# Altium PCB PCB3.PcbDoc (part 1 of 2)
Units mm, origin at the board's own origin, x right, y up, seen from the top; angles counter-clockwise.
Board outline 152.4 x 101.6 mm, 4 copper layers (Top Layer, Int1 (GND), Layer 1, Bottom Layer), stack 1.237 mm thick; 184 components, 352 nets, 1100 pads, 26 vias.
Unrouted connection lines stored in the file: 656.
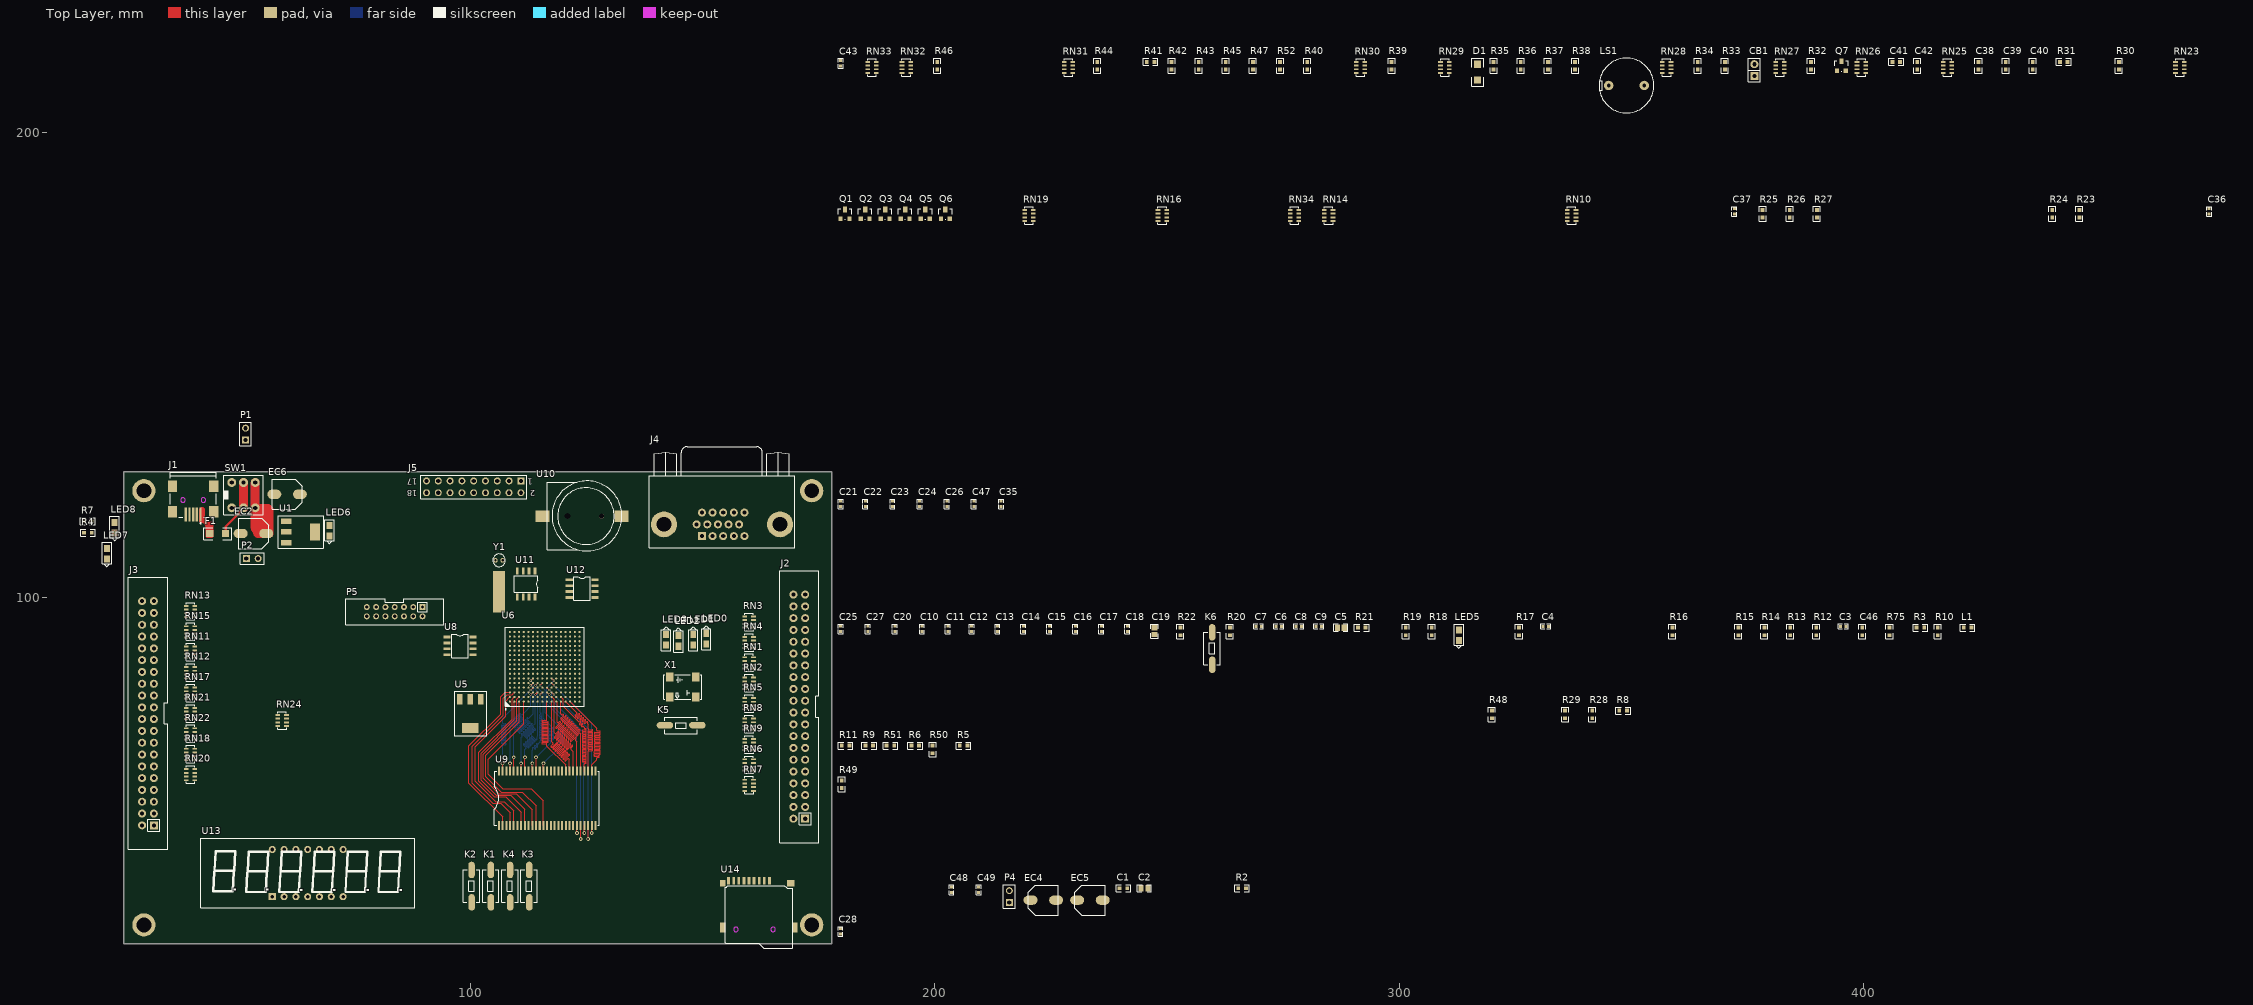
[diagram p0: Top Layer view]
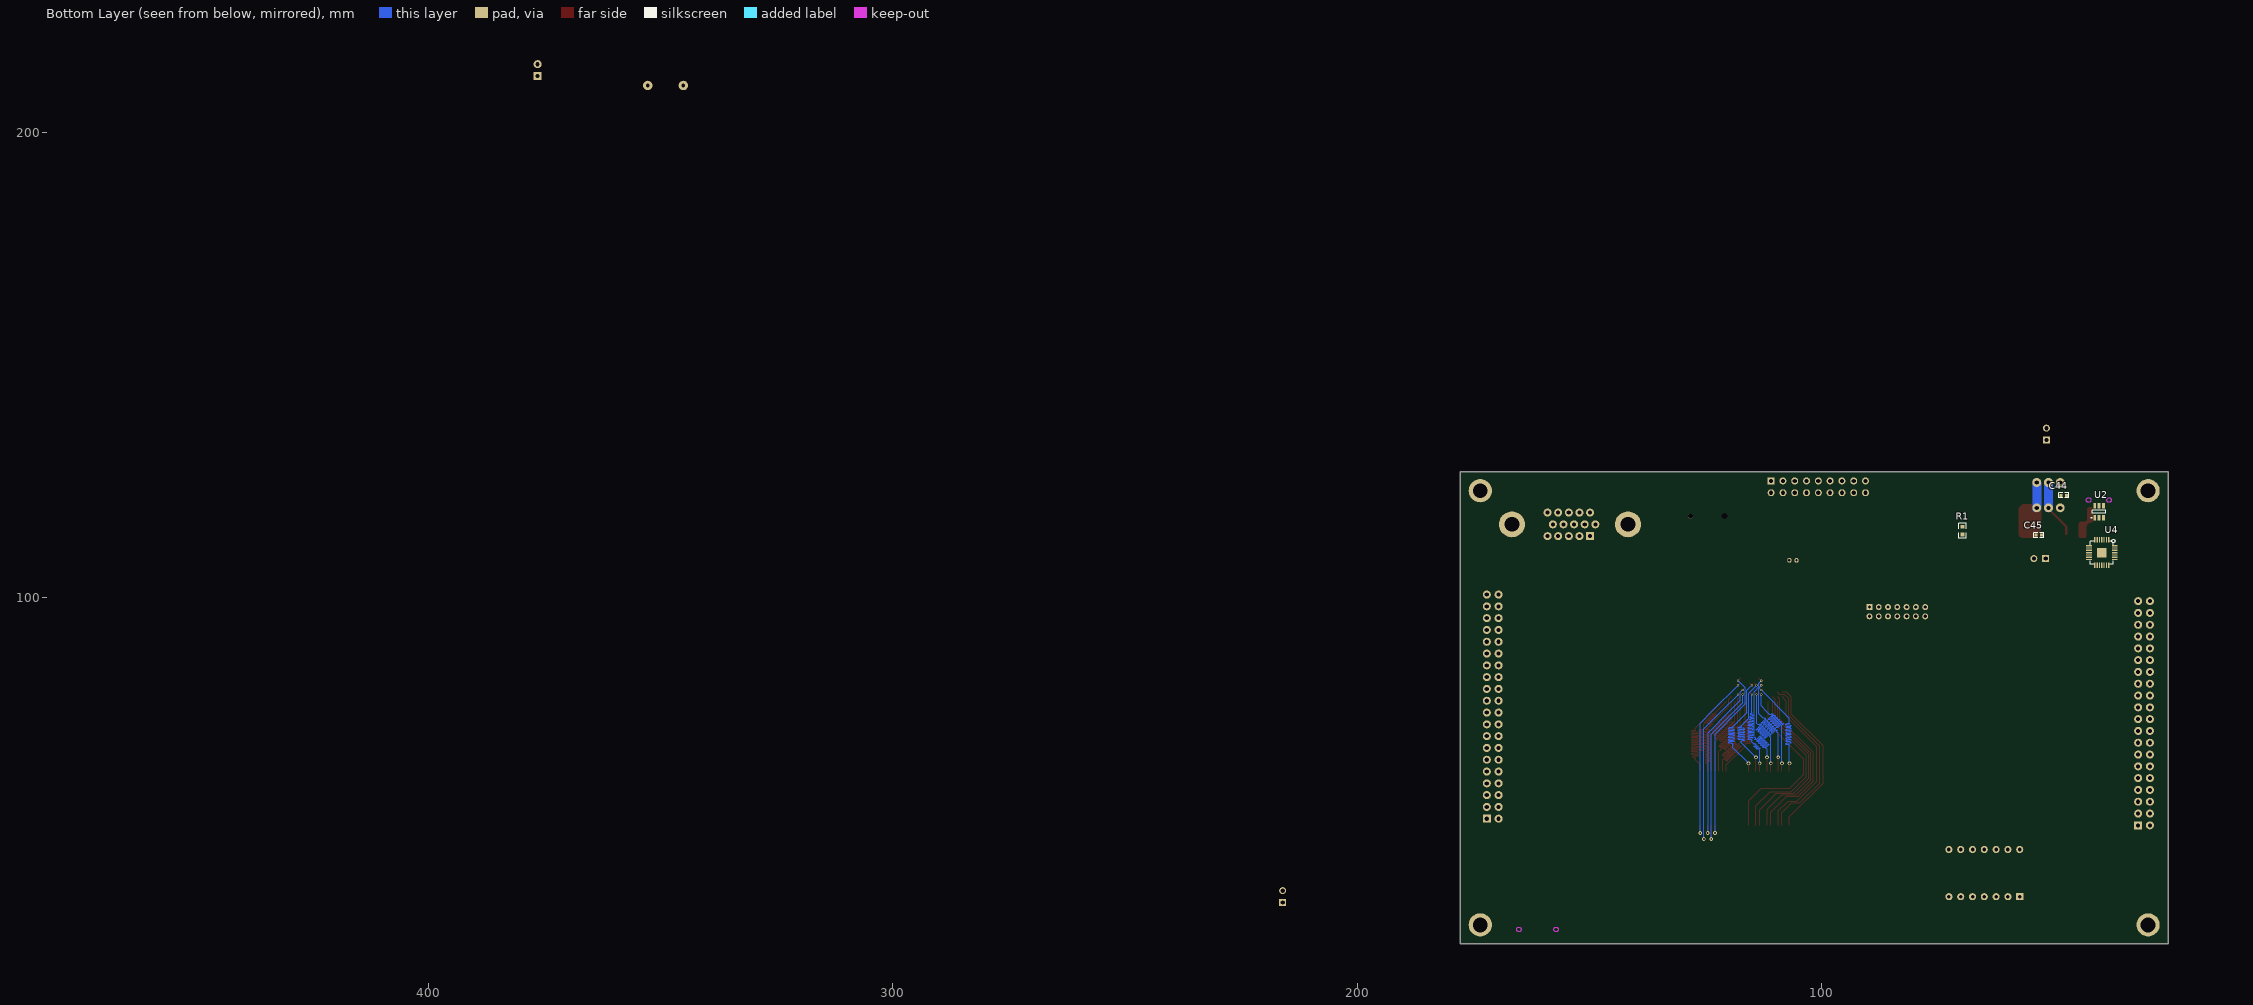
[diagram p1: Bottom Layer view, seen from below]
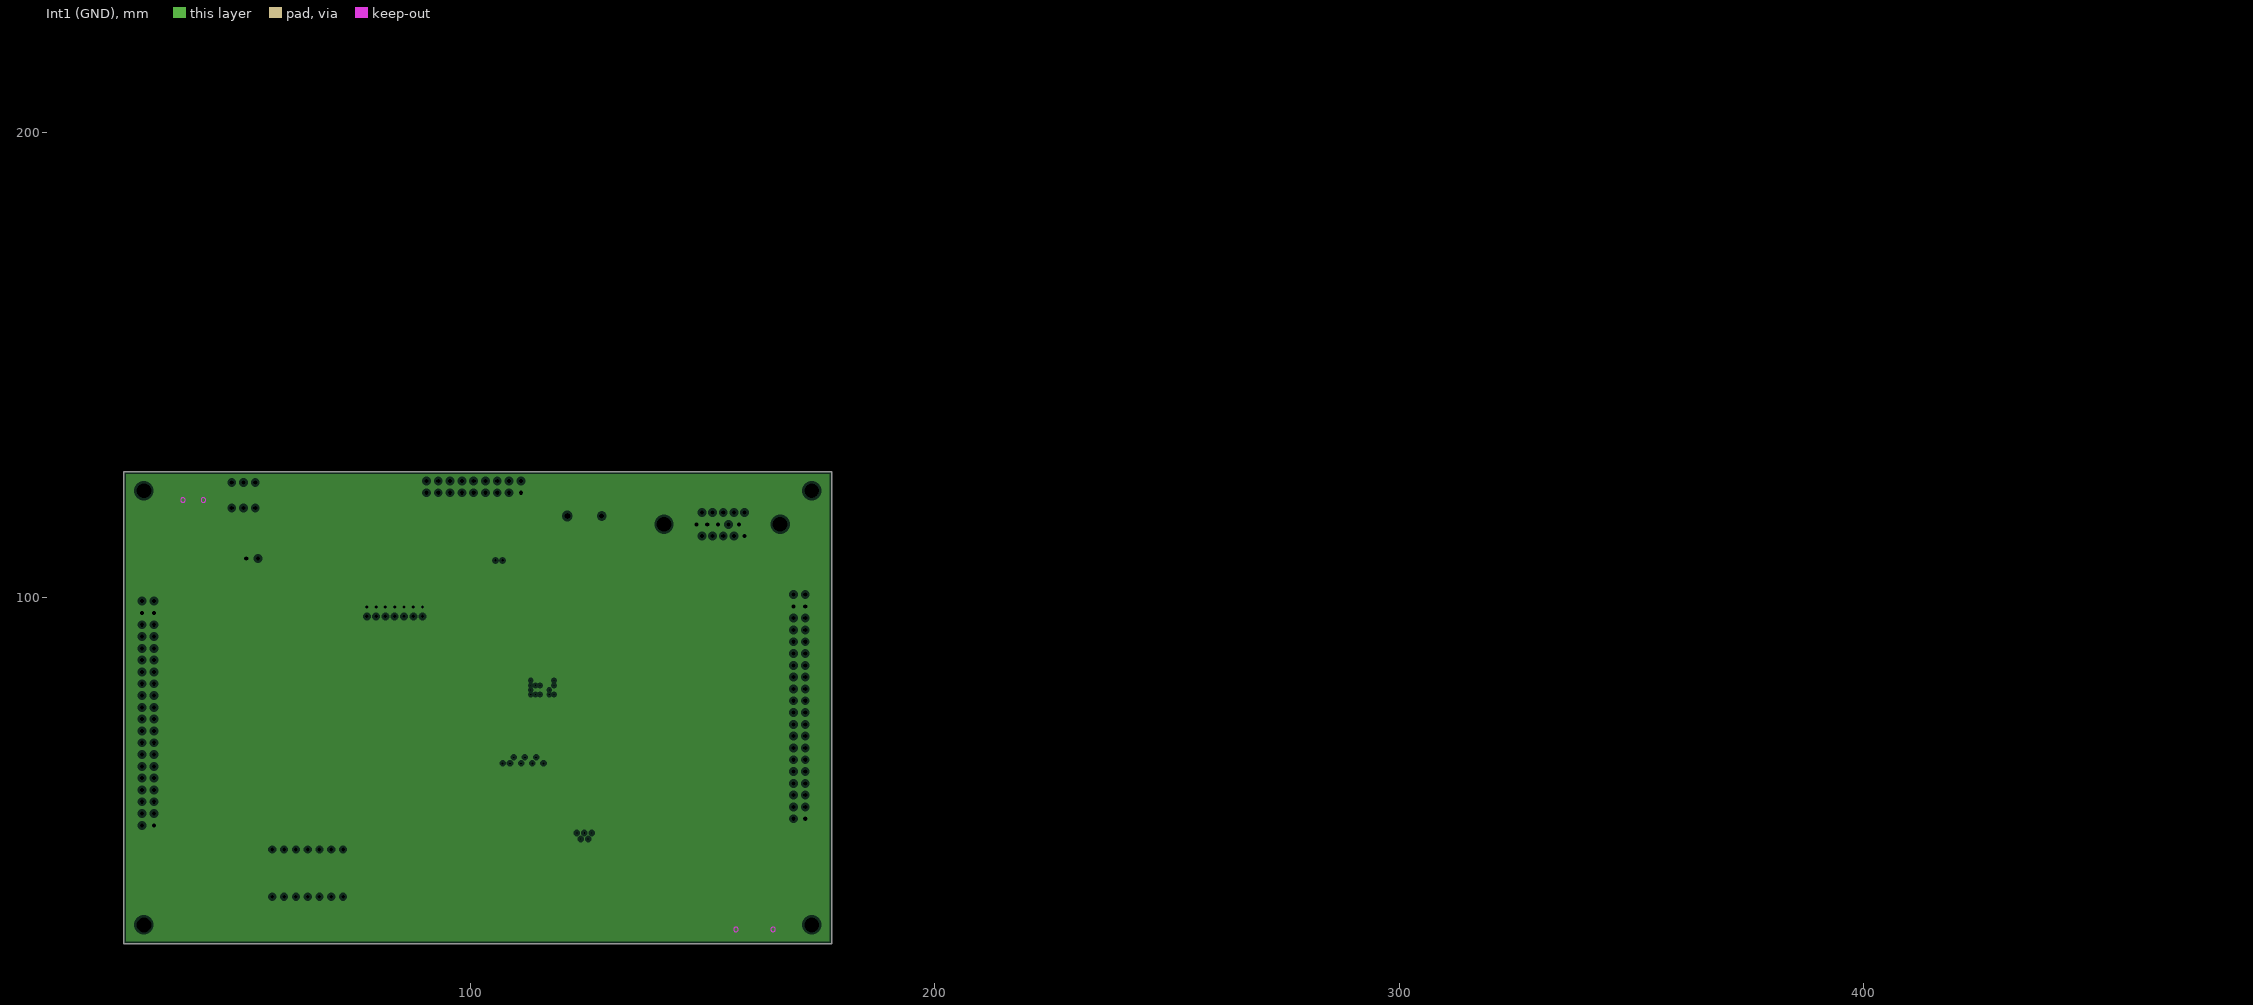
[diagram p2: Int1 (GND), clearances drawn from the general rule]

## Layer stack, top to bottom
Top Solder: solder mask 0.0152, SM-001, Dk 4
Top Layer: signal copper 0.035
Dielectric 2: prepreg 0.2104, 7628, Dk 4.4
Int1 (GND): plane copper 0.0175, net GND
Dielectric 3: core 0.7112, Core-039, Dk 4.6
Layer 1: signal copper 0.0175
Dielectric 1: prepreg 0.2104, 7628, Dk 4.4
Bottom Layer: signal copper 0.035
Board Layer Stack Bottom Solder: solder mask 0.0152, SM-001, Dk 4

## Board outline
25.4,25.4 177.8,25.4 177.8,127 25.4,127

## Design rules (kind name [scope] priority, off if disabled: settings)
Clearance Clearance_FPGA [WithinRoom('FPGA')] p1: gap=0.15 ignorepadtopadclearanceinfootprint=FALSE
Clearance [All] p2: gap=0.15 ignorepadtopadclearanceinfootprint=FALSE
ComponentClearance [All] p1: gap=0.1 collisioncheckmode=3 verticalgap=0.1 showdistances=FALSE
DiffPairsRouting "Schematic Differential Pairs Routing" [InNetClass('USB')] p1: maxlimit=0.15 minlimit=0.15 mostfreqgap=0.15 toplayer_minwidth=0.15 toplayer_maxwidth=0.15 toplayer_prefwidth=0.15 midlayer2_minwidth=0.15 midlayer2_maxwidth=0.15 midlayer2_prefwidth=0.15 bottomlayer_minwidth=0.15 bottomlayer_maxwidth=0.15 bottomlayer_prefwidth=0.15 maxuncoupledlength=12.7
DiffPairsRouting [All] p2: maxlimit=0.254 minlimit=0.254 mostfreqgap=0.254 toplayer_minwidth=0.381 toplayer_maxwidth=0.381 toplayer_prefwidth=0.381 midlayer2_minwidth=0.381 midlayer2_maxwidth=0.381 midlayer2_prefwidth=0.381 bottomlayer_minwidth=0.381 bottomlayer_maxwidth=0.381 bottomlayer_prefwidth=0.381 maxuncoupledlength=12.7
MatchedLengths "Schematic Matched Net Lengths_4" [InNetClass('SDCARD')] p1: tolerance=2.54 checknetsindiffpair=FALSE checkdiffpairvsdiffpair=TRUE checkxsignals=TRUE checkothers=TRUE
MatchedLengths "Schematic Matched Net Lengths_3" [InNetClass('USB')] p2: tolerance=2.54 checknetsindiffpair=TRUE checkdiffpairvsdiffpair=FALSE checkxsignals=FALSE checkothers=FALSE
MatchedLengths "Schematic Matched Net Lengths_2" [InNetClass('SRAM_DATA')] p3: tolerance=2.54 checknetsindiffpair=FALSE checkdiffpairvsdiffpair=TRUE checkxsignals=TRUE checkothers=TRUE
MatchedLengths "Schematic Matched Net Lengths_1" [InNetClass('SRAM_ADDR')] p4: tolerance=2.54 checknetsindiffpair=FALSE checkdiffpairvsdiffpair=TRUE checkxsignals=TRUE checkothers=TRUE
MatchedLengths "Schematic Matched Net Lengths" [InNetClass('VGA')] p5: tolerance=2.54 checknetsindiffpair=FALSE checkdiffpairvsdiffpair=TRUE checkxsignals=TRUE checkothers=TRUE
PlaneClearance [All] p1: clearance=0.508
PlaneConnect [All] p1: planeconnectstyle=Relief reliefexpansion=0.508 reliefentries=4 reliefconductorwidth=0.254 reliefairgap=0.254
PolygonConnect [All] p1: connectstyle=Relief reliefconductorwidth=0.254 reliefentries=4 polygonreliefangle="90 Angle" airgapwidth=0.254
RoomDefinition FPGA [InComponentClass('Room Definition1')] p1: confinementstyle=ConfineIn formatcopy=TRUE lockcomponents=FALSE outline 106.366,75.409 106.366,94.659 125.616,94.659 125.616,75.409
RoutingVias RoutingVias_FPGA [WithinRoom('FPGA')] p1: holewidth=0.25 width=0.48 viastyle="Through Hole" minholewidth=0.25 minwidth=0.48 maxholewidth=0.25 maxwidth=0.48
RoutingVias [All] p2: holewidth=0.4 width=0.8 viastyle="Through Hole" minholewidth=0.4 minwidth=0.8 maxholewidth=0.4 maxwidth=0.8
SolderMaskExpansion [All] p1: expansion=0.102 istentingtop=FALSE
SupplyNets "Schematic Supply Nets_4" [InNet('VBUS')] p1: voltage=0.000
SupplyNets "Schematic Supply Nets_3" [InNet('D1V2')] p2: voltage=0.000
SupplyNets "Schematic Supply Nets_2" [InNet('GND')] p3: voltage=0.000
SupplyNets "Schematic Supply Nets_1" [InNet('D3V3')] p4: voltage=0.000
SupplyNets "Schematic Supply Nets" [InNet('VCC')] p5: voltage=0.000
Width Width_FPGA [WithinRoom('FPGA')] p1: maxlimit=0.1 minlimit=0.1 preferedwidth=0.1
Width [All] p2: maxlimit=0.15 minlimit=0.15 preferedwidth=0.15
26 further rules are at their usual default settings.

## Classes and differential pairs
component class "Room Definition1": U6
net class SDCARD: SD_CLK SD_DIN SD_DOUT
net class SRAM_DATA: S_DB0 S_DB1 S_DB2 S_DB3 S_DB4 S_DB5 S_DB6 S_DB7 S_DB8 S_DB9 S_DB10 S_DB11 S_DB12 S_DB13 S_DB14 S_DB15
net class SRAM_ADDR: S_A0 S_A1 S_A2 S_A3 S_A4 S_A5 S_A6 S_A7 S_A8 S_A9 S_A10 S_A11 S_A12
net class VGA: VGAD0 VGAD1 VGAD2 VGAD3 VGAD4 VGAD5 VGAD6 VGAD7 VGAD8 VGAD9 VGAD10 VGAD11 VGAD12 VGAD13 VGAD14 VGAD15
net class VGAD[15..0]: VGAD0 VGAD1 VGAD2 VGAD3 VGAD4 VGAD5 VGAD6 VGAD7 VGAD8 VGAD9 VGAD10 VGAD11 VGAD12 VGAD13 VGAD14 VGAD15
net class USB: USB_N USB_P
net class SEL[0..5]: SEL0 SEL1 SEL2 SEL3 SEL4 SEL5
net class S_DB[0..15]: S_DB0 S_DB1 S_DB2 S_DB3 S_DB4 S_DB5 S_DB6 S_DB7 S_DB8 S_DB9 S_DB10 S_DB11 S_DB12 S_DB13 S_DB14 S_DB15
net class S_A[0..12]: S_A0 S_A1 S_A2 S_A3 S_A4 S_A5 S_A6 S_A7 S_A8 S_A9 S_A10 S_A11 S_A12
net class DIG[0..7]: DIG0 DIG1 DIG2 DIG3 DIG4 DIG5 DIG6 DIG7
component class 7_VGA: C38 C39 C40 C41 C42 C43 CB1 D1 J4 J5 K1 K2 K3 K4 LS1 Q7 R30 R31 R32 R33 R34 R35 R36 R37 R38 R39 R40 R41 R42 R43 R44 R45 R46 R47 R52 RN23 RN24 RN25 RN26 RN27 RN28 RN29 RN30 RN31 RN32 RN33 U14
component class 6_DIG: C36 C37 J2 J3 LED0 LED1 LED2 LED3 Q1 Q2 Q3 Q4 Q5 Q6 R23 R24 R25 R26 R27 RN1 RN2 RN3 RN4 RN5 RN6 RN7 RN8 RN9 RN10 RN11 RN12 RN13 RN14 RN15 RN16 RN17 RN18 RN19 RN20 RN21 RN22 RN34 U10 U11 U12 U13 Y1
component class 5_SDRAM: C21 C22 C23 C24 C26 C28 C35 C47 U9
component class 4_FPGA: C3 C4 C5 C6 C7 C8 C9 C10 C11 C12 C13 C14 C15 C16 C17 C18 C19 C20 C25 C27 C46 K5 K6 L1 LED5 P5 R3 R8 R10 R12 R13 R14 R15 R16 R17 R18 R19 R20 R21 R22 R28 R29 R48 R75 U8 X1
component class 3_FPGA: R5 R6 R9 R11 R50 R51
component class 2_FPGA: R49 U6
component class 1_POWER: C1 C2 C44 C45 C48 C49 EC2 EC4 EC5 EC6 F1 J1 LED6 LED7 LED8 P1 P2 P4 R1 R2 R4 R7 SW1 U1 U2 U4 U5
differential pair USB: +USB_P -USB_N

## Components (designator, comment, footprint, x,y, rotation, side; value= is the part's Value field where it differs from the comment)
C1 "1uF" 0603 239.776,37.338 r0 top
C2 "10uF" 0805 244.348,37.338 r0 top
C3 "0.1uF" 0402 394.97,93.726 r0 top
C4 "104" 0402 330.962,93.726 r0 top
C5 "10uF" 0805 286.639,93.472 r0 top
C6 "104" 0402 273.431,93.726 r0 top
C7 "104" 0402 269.113,93.726 r0 top
C8 "104" 0402 277.749,93.726 r0 top
C9 "104" 0402 282.067,93.726 r0 top
C10 "104" 0402 197.231,92.583 r90 top
C11 "104" 0402 202.819,92.583 r90 top
C12 "104" 0402 207.899,92.583 r90 top
C13 "104" 0402 213.487,92.583 r90 top
C14 "104" 0402 219.075,92.583 r90 top
C15 "104" 0402 224.663,92.583 r90 top
C16 "104" 0402 230.251,92.583 r90 top
C17 "104" 0402 235.839,92.583 r90 top
C18 "104" 0402 241.427,92.583 r90 top
C19 "10uF" 0805 247.269,91.948 r90 top
C20 "104" 0402 191.389,92.583 r90 top
C21 "104" 0402 179.705,119.507 r90 top
C22 "104" 0402 185.039,119.507 r90 top
C23 "104" 0402 190.881,119.507 r90 top
C24 "104" 0402 196.723,119.507 r90 top
C25 "104" 0402 179.705,92.583 r90 top
C26 "104" 0402 202.565,119.507 r90 top
C27 "104" 0402 185.547,92.583 r90 top
C28 "104" 0402 179.68,27.483 r90 top
C35 "104" 0402 214.249,119.507 r90 top
C36 "104" 0402 474.345,182.499 r90 top
C37 "104" 0402 372.11,182.499 r90 top
C38 "5p1" 0603 424.688,213.614 r90 top
C39 "5p1" 0603 430.53,213.614 r90 top
C40 "5p1" 0603 436.372,213.614 r90 top
C41 "5p1" 0603 406.146,215.265 r0 top
C42 "5p1" 0603 411.48,213.614 r90 top
C43 "104" 0402 179.705,214.376 r90 top
C44 "104" 0402 48.463,121.945 r180 bottom
C45 "104" 0402 53.848,113.386 r180 bottom
C46 "4.7uF" 0603 399.669,91.821 r90 top
C47 "104" 0402 208.407,119.507 r90 top
C48 "104" 0402 203.581,36.449 r90 top
C49 "104" 0402 209.423,36.449 r90 top
CB1 "BUZ" SIP2 376.428,212.217 r90 top
D1 "" 1206 316.865,211.328 r90 top
EC2 "100uF/16V" AEC6.5 56.046,113.741 r180 top
EC4 "100uF/16V" AEC6.5 220.599,34.798 r0 top
EC5 "100uF/16V" AEC6.5 230.632,34.798 r0 top
EC6 "100uF/16V" AEC6.5 63.297,122.174 r180 top
F1 "" 1206 43.891,113.69 r0 top
J1 "EC2" MINIUSBB 40.315,117.827 r270 top
J2 "IDC40" IDC-40J 170.815,76.454 r90 top
J3 "IDC40" IDC-40J 30.582,75.032 r90 top
J4 "" VGA 149.86,113.157 r90 top
J5 "Header 9X2" HDR2X9 110.871,125.044 r180 top
K1 "KEY1" KEY735SO 104.422,34.315 r90 top
K2 "KEY2" KEY735SO 100.287,34.315 r90 top
K3 "KEY3" KEY735SO 112.692,34.315 r90 top
K4 "KEY4" KEY735SO 108.557,34.315 r90 top
K5 "RESET" KEY735SO 148.869,72.466 r180 top
K6 "CONFIG" KEY735SO 259.715,85.471 r90 top
L1 "Bead" 0603 421.513,93.472 r0 top
LED0 "LED0" LEDSO 150.774,92.253 r270 top
LED1 "LED1" LEDso 147.98,91.999 r270 top
LED2 "LED2" LEDSO 144.805,91.745 r270 top
LED3 "LED3" LEDSO 142.138,91.999 r270 top
LED5 "CONFIG" LEDSO 312.801,90.678 r90 top
LED6 "D3V3" LEDSO 69.67,113.157 r90 top
LED7 "RXD" LEDSO 21.753,108.255 r90 top
LED8 "TXD" LEDSO 23.419,113.843 r90 top
LS1 "BUZZER" BUZZER 345.059,210.185 r0 top
P1 "3.3V" HDR1X2 51.608,133.86 r90 top
P2 "5V" HDR1X2 51.765,108.331 r0 top
P4 "1.2V" HDR1X2 216.027,34.29 r90 top
P5 "JTAG" JTAG14-.5 83.705,96.885 r180 top
Q1 "9012" SOT23 179.705,181.483 r0 top
Q2 "9012" SOT23 184.023,181.483 r0 top
Q3 "9012" SOT23 188.341,181.483 r0 top
Q4 "9012" SOT23 192.659,181.483 r0 top
Q5 "9012" SOT23 196.977,181.483 r0 top
Q6 "9012" SOT23 201.295,181.483 r0 top
Q7 "9012" SOT23 394.208,213.36 r0 top
R1 "1K" 0603 69.672,113.513 r90 bottom
R2 "10k" 0603 265.303,37.338 r0 top
R3 "33R" 0603 411.353,93.472 r0 top
R4 "1K" 0603 16.84,113.894 r0 top
R5 "33R" 0603 205.359,68.072 r0 top
R6 "33R" 0603 194.945,68.072 r0 top
R7 "1K" 0603 16.789,116.383 r0 top
R8 "33" 0603 347.354,75.597 r0 top
R9 "10K" 0603 185.039,68.072 r0 top
R10 "10K" 0603 415.925,91.821 r90 top
R11 "33R" 0603 179.959,68.072 r0 top
R12 "10K" 0603 389.763,91.821 r90 top
R13 "10K" 0603 384.175,91.821 r90 top
R14 "10K" 0603 378.587,91.821 r90 top
R15 "10K" 0603 372.999,91.821 r90 top
R16 "33R" 0603 358.775,91.821 r90 top
R17 "330" 0603 325.755,91.821 r90 top
R18 "10k" 0603 306.959,91.821 r90 top
R19 "10k" 0603 301.371,91.821 r90 top
R20 "220" 0603 263.525,91.821 r90 top
R21 "100" 0603 291.084,93.472 r0 top
R22 "100" 0603 252.857,91.821 r90 top
R23 "4k7" 0603 446.405,181.737 r90 top
R24 "4k7" 0603 440.563,181.737 r90 top
R25 "10k" 0603 378.206,181.737 r90 top
R26 "10k" 0603 384.048,181.737 r90 top
R27 "10k" 0603 389.89,181.737 r90 top
R28 "33" 0603 341.512,73.946 r90 top
R29 "33" 0603 335.67,73.946 r90 top
R30 "22" 0603 454.914,213.614 r90 top
R31 "22" 0603 442.214,215.265 r0 top
R32 "1K" 0603 388.62,213.614 r90 top
R33 "2K2" 0603 370.078,213.614 r90 top
R34 "15" 0603 364.236,213.614 r90 top
R35 "10k" 0603 320.294,213.614 r90 top
R36 "10k" 0603 326.136,213.614 r90 top
R37 "10k" 0603 331.978,213.614 r90 top
R38 "10k" 0603 337.82,213.614 r90 top
R39 "100" 0603 298.323,213.614 r90 top
R40 "100" 0603 280.162,213.614 r90 top
R41 "1K" 0603 245.618,215.265 r0 top
R42 "1K" 0603 250.952,213.614 r90 top
R43 "1K" 0603 256.794,213.614 r90 top
R44 "100" 0603 234.95,213.614 r90 top
R45 "1K" 0603 262.636,213.614 r90 top
R46 "100" 0603 200.533,213.614 r90 top
R47 "1K" 0603 268.478,213.614 r90 top
R48 "33" 0603 319.922,73.946 r90 top
R49 "4K7" 0603 179.959,58.928 r90 top
R50 "1K" 0603 199.517,66.421 r90 top
R51 "1K" 0603 189.611,68.072 r0 top
R52 "1K" 0603 274.32,213.614 r90 top
R75 "10k" 0603 405.511,91.821 r90 top
RN1 "33R" RN-8P 159.098,87.084 r0 top
RN2 "33R" RN-8P 159.098,82.69 r0 top
RN3 "33R" RN-8P 159.098,95.872 r0 top
RN4 "33R" RN-8P 159.098,91.478 r0 top
RN5 "33R" RN-8P 159.098,78.295 r0 top
RN6 "33R" RN-8P 159.098,65.113 r0 top
RN7 "33R" RN-8P 159.098,60.719 r0 top
RN8 "33R" RN-8P 159.098,73.901 r0 top
RN9 "33R" RN-8P 159.098,69.507 r0 top
RN10 "470" RN-8P 336.169,183.388 r0 top
RN11 "33R" RN-8P 38.829,89.37 r0 top
RN12 "33R" RN-8P 38.829,84.976 r0 top
RN13 "33R" RN-8P 38.829,98.158 r0 top
RN14 "470" RN-8P 283.845,183.388 r0 top
RN15 "33R" RN-8P 38.829,93.764 r0 top
RN16 "470" RN-8P 248.031,183.388 r0 top
RN17 "33R" RN-8P 38.829,80.581 r0 top
RN18 "33R" RN-8P 38.829,67.399 r0 top
RN19 "470" RN-8P 219.329,183.388 r0 top
RN20 "33R" RN-8P 38.829,63.005 r0 top
RN21 "33R" RN-8P 38.829,76.187 r0 top
RN22 "33R" RN-8P 38.829,71.793 r0 top
RN23 "1K" RN-8P 467.106,215.265 r0 top
RN24 "2K" RN-8P 58.547,74.676 r0 top
RN25 "2K" RN-8P 417.068,215.265 r0 top
RN26 "1K" RN-8P 398.526,215.265 r0 top
RN27 "2K" RN-8P 381,215.265 r0 top
RN28 "2K" RN-8P 356.616,215.265 r0 top
RN29 "2K" RN-8P 308.864,215.265 r0 top
RN30 "2K" RN-8P 290.703,215.265 r0 top
RN31 "1K" RN-8P 227.838,215.265 r0 top
RN32 "2K" RN-8P 192.913,215.265 r0 top
RN33 "2K" RN-8P 185.547,215.265 r0 top
RN34 "470" RN-8P 276.479,183.388 r0 top
SW1 "SW" KEY_DPDT 48.616,119.253 r90 top
U1 "1117-3.3" SOT223 60.373,116.371 r270 top
U2 "" SOT23-6 40.259,118.415 r90 bottom
U4 "CP2102" QFN28 38.183,112.358 r270 bottom
U5 "1117-1.2" SOT223 102.274,78.054 r180 top
U6 "XC6SLX9-2FTG256C" FTG256 115.991,85.034 r90 top
U8 "M25P16-VMN3PB" SO8 94.996,91.44 r0 top
U9 "HY57V2562GTR" TSOP-54 106.135,50.902 r180 top
U10 "battery" BATSO 114.57,117.475 r180 top
U11 "DS1302" SO8 113.919,105.664 r270 top
U12 "24LC04" SO8 121.285,103.759 r0 top
U13 "HEX6" NIX_6 57.353,35.535 r0 top
U14 "SD" TF 162.128,33.934 r90 top
X1 "50M" CY_4 148.488,78.537 r0 top
Y1 "32.768kHz" CY_SMALL 105.41,107.95 r0 top

## Footprints (in the part's own frame and the unit in brackets; to place one, negate y for a bottom-side part, rotate by r counter-clockwise, add the part's x,y. Pads: shape width x height; smd on the part's side, far side on the other; paste and mask are expansions set on the pad)
0402 [mm]
  rect 0.635x0.635 smd: 1(0,0) 2(1.175,0)
  silkscreen extent -0.48,-0.53 1.63,0.53
0603 [mil]
  rect 32x32 smd: 1(0,0) 2(65,0)
  silkscreen extent -30,-30 95,30
0805 [mm]
  rect 1.1x1.36 smd: 1(0,0) 2(1.5,0)
  silkscreen extent -0.76,-0.79 2.24,0.79
1206 [mil]
  rect 60x60 smd: 1(0,0) 2(135,0)
  silkscreen extent -50,-50 185,50
AEC6.5 [mm]
  oval 3x2 smd: 1(0,0) 2(5.5,0)
  silkscreen extent -0.5,-3.25 6,3.25
BATSO [mm]
  round 1 hole 1.1: 0(-13.7,0)
  round 1 hole 1.3: 0(-6.3,0)
  rect 3x2.5 smd: 1(-1,0) 2(-18,0)
  silkscreen extent -18.06,-7.57 -1.95,7.48
BUZZER [mil]
  round 80 hole 32: 1(0,0) 2(301.57,0)
  silkscreen extent -81,-232 383,232
CY_4 [mm]
  rect 1.6x2 smd: 1(0,4.318) 2(-5.588,4.318) 3(-5.588,0) 4(0,0)
  silkscreen extent -6.88,-0.51 1.35,4.83
CY_SMALL [mil]
  rect 100x354.33 smd: 0(29,-267)
  oval 35x40 hole 20: 1(0,0) 2(60,0)
  silkscreen extent -24,-54 84,54
FTG256 [mm] "BGA, 256-Leads, Body 17x17mm, Pitch 1mm"
  round 0.45 smd: A1(-7.5,7.5) A2(-6.5,7.5) A3(-5.5,7.5) A4(-4.5,7.5) A5(-3.5,7.5) A6(-2.5,7.5) A7(-1.5,7.5) A8(-0.5,7.5) A9(0.5,7.5) A10(1.5,7.5) A11(2.5,7.5) A12(3.5,7.5) A13(4.5,7.5) A14(5.5,7.5) A15(6.5,7.5) A16(7.5,7.5) B1(-7.5,6.5) B2(-6.5,6.5) B3(-5.5,6.5) B4(-4.5,6.5) B5(-3.5,6.5) B6(-2.5,6.5) B7(-1.5,6.5) B8(-0.5,6.5) B9(0.5,6.5) B10(1.5,6.5) B11(2.5,6.5) B12(3.5,6.5) B13(4.5,6.5) B14(5.5,6.5) B15(6.5,6.5) B16(7.5,6.5) C1(-7.5,5.5) C2(-6.5,5.5) C3(-5.5,5.5) C4(-4.5,5.5) C5(-3.5,5.5) C6(-2.5,5.5) C7(-1.5,5.5) C8(-0.5,5.5) C9(0.5,5.5) C10(1.5,5.5) C11(2.5,5.5) C12(3.5,5.5) C13(4.5,5.5) C14(5.5,5.5) C15(6.5,5.5) C16(7.5,5.5) D1(-7.5,4.5) D2(-6.5,4.5) D3(-5.5,4.5) D4(-4.5,4.5) D5(-3.5,4.5) D6(-2.5,4.5) D7(-1.5,4.5) D8(-0.5,4.5) D9(0.5,4.5) D10(1.5,4.5) D11(2.5,4.5) D12(3.5,4.5) D13(4.5,4.5) D14(5.5,4.5) D15(6.5,4.5) D16(7.5,4.5) E1(-7.5,3.5) E2(-6.5,3.5) E3(-5.5,3.5) E4(-4.5,3.5) E5(-3.5,3.5) E6(-2.5,3.5) E7(-1.5,3.5) E8(-0.5,3.5) E9(0.5,3.5) E10(1.5,3.5) E11(2.5,3.5) E12(3.5,3.5) E13(4.5,3.5) E14(5.5,3.5) E15(6.5,3.5) E16(7.5,3.5) F1(-7.5,2.5) F2(-6.5,2.5) F3(-5.5,2.5) F4(-4.5,2.5) F5(-3.5,2.5) F6(-2.5,2.5) F7(-1.5,2.5) F8(-0.5,2.5) F9(0.5,2.5) F10(1.5,2.5) F11(2.5,2.5) F12(3.5,2.5) F13(4.5,2.5) F14(5.5,2.5) F15(6.5,2.5) F16(7.5,2.5) G1(-7.5,1.5) G2(-6.5,1.5) G3(-5.5,1.5) G4(-4.5,1.5) G5(-3.5,1.5) G6(-2.5,1.5) G7(-1.5,1.5) G8(-0.5,1.5) G9(0.5,1.5) G10(1.5,1.5) G11(2.5,1.5) G12(3.5,1.5) G13(4.5,1.5) G14(5.5,1.5) G15(6.5,1.5) G16(7.5,1.5) H1(-7.5,0.5) H2(-6.5,0.5) H3(-5.5,0.5) H4(-4.5,0.5) H5(-3.5,0.5) H6(-2.5,0.5) H7(-1.5,0.5) H8(-0.5,0.5) H9(0.5,0.5) H10(1.5,0.5) H11(2.5,0.5) H12(3.5,0.5) H13(4.5,0.5) H14(5.5,0.5) H15(6.5,0.5) H16(7.5,0.5) J1(-7.5,-0.5) J2(-6.5,-0.5) J3(-5.5,-0.5) J4(-4.5,-0.5) J5(-3.5,-0.5) J6(-2.5,-0.5) J7(-1.5,-0.5) J8(-0.5,-0.5) J9(0.5,-0.5) J10(1.5,-0.5) J11(2.5,-0.5) J12(3.5,-0.5) J13(4.5,-0.5) J14(5.5,-0.5) J15(6.5,-0.5) J16(7.5,-0.5) K1(-7.5,-1.5) K2(-6.5,-1.5) K3(-5.5,-1.5) K4(-4.5,-1.5) K5(-3.5,-1.5) K6(-2.5,-1.5) K7(-1.5,-1.5) K8(-0.5,-1.5) K9(0.5,-1.5) K10(1.5,-1.5) K11(2.5,-1.5) K12(3.5,-1.5) K13(4.5,-1.5) K14(5.5,-1.5) K15(6.5,-1.5) K16(7.5,-1.5) L1(-7.5,-2.5) L2(-6.5,-2.5) L3(-5.5,-2.5) L4(-4.5,-2.5) L5(-3.5,-2.5) L6(-2.5,-2.5) L7(-1.5,-2.5) L8(-0.5,-2.5) L9(0.5,-2.5) L10(1.5,-2.5) L11(2.5,-2.5) L12(3.5,-2.5) L13(4.5,-2.5) L14(5.5,-2.5) L15(6.5,-2.5) L16(7.5,-2.5) M1(-7.5,-3.5) M2(-6.5,-3.5) M3(-5.5,-3.5) M4(-4.5,-3.5) M5(-3.5,-3.5) M6(-2.5,-3.5) M7(-1.5,-3.5) M8(-0.5,-3.5) M9(0.5,-3.5) M10(1.5,-3.5) M11(2.5,-3.5) M12(3.5,-3.5) M13(4.5,-3.5) M14(5.5,-3.5) M15(6.5,-3.5) M16(7.5,-3.5) N1(-7.5,-4.5) N2(-6.5,-4.5) N3(-5.5,-4.5) N4(-4.5,-4.5) N5(-3.5,-4.5) N6(-2.5,-4.5) N7(-1.5,-4.5) N8(-0.5,-4.5) N9(0.5,-4.5) N10(1.5,-4.5) N11(2.5,-4.5) N12(3.5,-4.5) N13(4.5,-4.5) N14(5.5,-4.5) N15(6.5,-4.5) N16(7.5,-4.5) P1(-7.5,-5.5) P2(-6.5,-5.5) P3(-5.5,-5.5) P4(-4.5,-5.5) P5(-3.5,-5.5) P6(-2.5,-5.5) P7(-1.5,-5.5) P8(-0.5,-5.5) P9(0.5,-5.5) P10(1.5,-5.5) P11(2.5,-5.5) P12(3.5,-5.5) P13(4.5,-5.5) P14(5.5,-5.5) P15(6.5,-5.5) P16(7.5,-5.5) R1(-7.5,-6.5) R2(-6.5,-6.5) R3(-5.5,-6.5) R4(-4.5,-6.5) R5(-3.5,-6.5) R6(-2.5,-6.5) R7(-1.5,-6.5) R8(-0.5,-6.5) R9(0.5,-6.5) R10(1.5,-6.5) R11(2.5,-6.5) R12(3.5,-6.5) R13(4.5,-6.5) R14(5.5,-6.5) R15(6.5,-6.5) R16(7.5,-6.5) T1(-7.5,-7.5) T2(-6.5,-7.5) T3(-5.5,-7.5) T4(-4.5,-7.5) T5(-3.5,-7.5) T6(-2.5,-7.5) T7(-1.5,-7.5) T8(-0.5,-7.5) T9(0.5,-7.5) T10(1.5,-7.5) T11(2.5,-7.5) T12(3.5,-7.5) T13(4.5,-7.5) T14(5.5,-7.5) T15(6.5,-7.5) T16(7.5,-7.5)
  silkscreen extent -9.27,-8.5 8.5,8.5, body extent -8.5,-8.5 8.5,8.5, height 1.55
HDR1X2 [mm] "Connector; Header; 2 Position"
  rect 1.5x1.5 hole 0.9: 1(0,0)
  round 1.5 hole 0.9: 2(2.54,0)
  silkscreen extent -1.27,-1.27 3.81,1.27
HDR2X9 [mm] "Connector; Header; 9x2 Position"
  rect 1.5x1.5 hole 0.9: 1(0,0)
  round 1.5 hole 0.9: 2(0,2.54) 3(2.54,0) 4(2.54,2.54) 5(5.08,0) 6(5.08,2.54) 7(7.62,0) 8(7.62,2.54) 9(10.16,0) 10(10.16,2.54) 11(12.7,0) 12(12.7,2.54) 13(15.24,0) 14(15.24,2.54) 15(17.78,0) 16(17.78,2.54) 17(20.32,0) 18(20.32,2.54)
  silkscreen extent -1.27,-1.27 21.59,3.81
IDC-40J [mil]
  rect 68x68 hole 35: 1(-950,-50)
  round 68 hole 35: 2(-950,50) 3(-850,-50) 4(-850,50) 5(-750,-50) 6(-750,50) 7(-650,-50) 8(-650,50) 9(-550,-50) 10(-550,50) 11(-450,-50) 12(-450,50) 13(-350,-50) 14(-350,50) 15(-250,-50) 16(-250,50) 17(-150,-50) 18(-150,50) 19(-50,-50) 20(-50,50) 21(50,-50) 22(50,50) 23(150,-50) 24(150,50) 25(250,-50) 26(250,50) 27(350,-50) 28(350,50) 29(450,-50) 30(450,50) 31(550,-50) 32(550,50) 33(650,-50) 34(650,50) 35(750,-50) 36(750,50) 37(850,-50) 38(850,50) 39(950,-50) 40(950,50)
  silkscreen extent -1154,-167 1154,167
JTAG14-.5 [mm]
  rect 1.27x1.27 hole 0.711: 1(-6,-1)
  round 1.27 hole 0.711: 2(-6,1) 3(-4,-1) 4(-4,1) 5(-2,-1) 6(-2,1) 7(0,-1) 8(0,1) 9(2,-1) 10(2,1) 11(4,-1) 12(4,1) 13(6,-1) 14(6,1)
  silkscreen extent -10.57,-2.77 10.57,2.76
KEY735SO [mil]
  oval 140x55.12 smd: 1(0,0) 2(275,1)
  silkscreen extent 0,-67 276,71
KEY_DPDT [mil]
  round 75 hole 35: 1(0,0) 2(0,-100) 3(0,-200) 4(214.57,0) 5(214.57,-100) 6(214.57,-200)
  silkscreen extent -58,-268 277,68
LEDSO [mil]
  rect 60x50 smd: 1(90,0) 2(0,0)
  silkscreen extent -65,-40 140,40
LEDso [mil]
  rect 60x50 smd: 1(90,0) 2(0,0)
  silkscreen extent -65,-40 140,40
MINIUSBB [mm]
  rect 3x0.5 smd: 1(0,1.6) 2(0,0.8) 3(0,0) 4(0,-0.8) 5(0,-1.6)
  rect 2.5x2 smd: 6(-0.6,-4.45) 7(-6.1,-4.45) 8(-0.6,4.45) 9(-6.1,4.45)
  Keep-Out Layer circle w0.152: c-3.1,-2.2 r0.5
  Keep-Out Layer circle w0.152: c-3.1,2.2 r0.5
  silkscreen extent -9.05,-4.95 2,4.95
NIX_6 [mil]
  rect 60x60 hole 30: 1(0,0)
  round 60 hole 30: 2(100,0) 3(200,0) 4(300,0) 5(400,0) 6(500,0) 7(600,0) 8(600,400) 9(500,400) 10(400,400) 11(300,400) 12(200,400) 13(100,400) 14(0,400)
  silkscreen extent -606,-95 1206,495
QFN28 [mm]
  rect 2x2 smd: 0(2.75,-1.5)
  rect 1.2x0.27 smd: 1(0,0) 2(0,-0.5) 3(0,-1) 4(0,-1.5) 5(0,-2) 6(0,-2.5) 7(0,-3) 15(5.5,-3) 16(5.5,-2.5) 17(5.5,-2) 18(5.5,-1.5) 19(5.5,-1) 20(5.5,-0.5) 21(5.5,0)
  rect 0.27x1.2 smd: 8(1.25,-4.25) 9(1.75,-4.25) 10(2.25,-4.25) 11(2.75,-4.25) 12(3.25,-4.25) 13(3.75,-4.25) 14(4.25,-4.25) 22(4.25,1.25) 23(3.75,1.25) 24(3.25,1.25) 25(2.75,1.25) 26(2.25,1.25) 27(1.75,1.25) 28(1.25,1.25)
  silkscreen extent -0.1,-4 5.25,1.35
RN-8P [mm]
  rect 1x0.4 smd: 1(0,0) 2(0,-0.8) 3(0,-1.6) 4(0,-2.4) 5(1.858,-2.4) 6(1.858,-1.6) 7(1.858,-0.8) 8(1.858,0)
  silkscreen extent 0,-3.05 1.88,0.71
SIP2 [mil]
  rect 68x68 hole 35: 1(0,0)
  round 68 hole 35: 2(100,0)
  silkscreen extent -50,-50 150,50
SO8 [mil]
  rect 60x24 smd: 1(0,0) 2(0,-50) 3(0,-100) 4(0,-150) 5(220,-150) 6(220,-100) 7(220,-50) 8(220,0)
  silkscreen extent 40,-175 180,25
SOT23 [mil]
  rect 36x36 smd: 1(0,0) 2(75,0)
  rect 36x50 smd: 3(38,80)
  silkscreen extent -20,-5 95,85
SOT23-6 [mm]
  rect 1.2x0.6 smd: 1(-1.25,0.95) 2(-1.25,0) 3(-1.25,-0.95) 4(1.25,-0.95) 5(1.25,0) 6(1.25,0.95)
  silkscreen extent -1.38,-1.45 0.3,1.76, body extent -1.4,-1.45 1.4,1.45, height 1.45
SOT223 [mm]
  rect 1.2x2.2 smd: 1(0,0) 2(2.3,0) 3(4.6,0)
  rect 3.6x2.2 smd: 4(2.3,6.2)
  silkscreen extent -1.2,-1.7 5.8,7.9
TF [mm]
  rect 1.6x0.6 smd: 1(5.05,-2.25) 2(5.05,-1.15) 3(5.05,-0.05) 4(5.05,1.05) 5(5.05,2.15) 6(5.05,3.25) 7(5.05,4.35) 8(5.05,5.45) 9(5.05,6.55)
  rect 1.4x1.2 smd: 10(4.55,7.75)
  rect 2.2x1.2 smd: 11(-5.05,7.75) 12(-5.05,-7.75)
  rect 1.4x1.6 smd: 13(4.55,-6.85)
  Keep-Out Layer circle w0.127: c-5.45,4.951 r0.5
  Keep-Out Layer circle w0.127: c-5.45,-3.05 r0.5
  silkscreen extent -9.47,-7.15 4.01,7.29
TSOP-54 [mil]
  rect 17x75 smd: 1(0,0) 2(-31.5,0) 3(-62.99,0) 4(-94.49,0) 5(-125.98,0) 6(-157.48,0) 7(-188.98,0) 8(-220.47,0) 9(-251.97,0) 10(-283.46,0) 11(-314.99,0) 12(-346.46,0) 13(-377.95,0) 14(-409.45,0) 15(-440.94,0) 16(-472.44,0) 17(-503.94,0) 18(-535.43,0) 19(-566.93,0) 20(-598.43,0) 21(-629.92,0) 22(-661.42,0) 23(-692.91,0) 24(-724.41,0) 25(-755.91,0) 26(-787.4,0) 27(-818.9,0) 28(-818.9,-460) 29(-787.4,-460) 30(-755.91,-460) 31(-724.41,-460) 32(-692.91,-460) 33(-661.42,-460) 34(-630,-460) 35(-598.43,-460) 36(-566.93,-460) 37(-535.43,-460) 38(-503.94,-460) 39(-472.44,-460) 40(-440.94,-460) 41(-409.45,-460) 42(-377.95,-460) 43(-346.46,-460) 44(-314.99,-460) 45(-283.46,-460) 46(-251.97,-460) 47(-220.47,-460) 48(-188.98,-460) 49(-157.48,-460) 50(-125.98,-460) 51(-94.49,-460) 52(-62.99,-460) 53(-31.5,-460) 54(0,-460)
  silkscreen extent -852,-460 40,0
VGA [mil]
  rect 68x68 hole 35: 1(0,0)
  round 68 hole 35: 2(0,-90) 3(0,-180) 4(0,-270) 5(0,-360) 6(100,45) 7(100,-45) 8(100,-135) 9(100,-225) 10(100,-315) 11(200,0) 12(200,-90) 13(200,-180) 14(200,-270) 15(200,-360)
  round 220 hole 125: 16(100,-662) 17(100,322)
  silkscreen extent -100,-785 759,445

## Part data
C1 C2 C3 C5 C19 C46: library part "CAP NP_Dup2"
C4 C6 C7 C8 C9 C10 C11 C12 C13 C14 C15 C16 C17 C18 C20 C25 C27 C37 C44 C45 C48 C49: library part C_Dup4
C21 C22 C23 C24 C26 C28 C35 C47: library part C_Dup2
C36: library part C_Dup3
C38 C39 C40 C41 C42 C43: library part C_Dup1
CB1: library part "Circuit Breaker", "Circuit Breaker", LatestRevisionDate=17-Jul-2002, LatestRevisionNote="Re-released for DXP Platform.", PackageDescription="Switch; 2 Leads", PackageReference=SPST-2, Published=24-Mar-1999, Publisher="Altium Limited"
D1: library part 4148
EC2 EC4 EC5 EC6: library part EC
F1: library part "Fuse 2", "Fuse", LatestRevisionDate=17-Jul-2002, LatestRevisionNote="Re-released for DXP Platform.", PackageDescription="Thru-Hole; 2 Leads", PackageReference=PIN-W2/E2.8, Published=8-Jun-2000, Publisher="Altium Limited"
J1: library part MiniUSBB, R50=J5
J2 J3: library part MHDR2X20, "Header, 20-Pin, Dual row", LatestRevisionDate=17-Jul-2002, LatestRevisionNote="Re-released for DXP Platform.", Publisher="Altium Limited"
J4: library part "Connector 15", "Receptacle Assembly, 15-Pin, Sim Line Connector", PackageDocument=B, DatasheetDocument=24-Nov-1999, Gender="Receptacle Header", LatestRevisionDate=17-Jul-2002, LatestRevisionNote="Re-released for DXP Platform.", Orientation="Right Angle", PackageReference=788574, Positions=15, Published=15-Jun-2001, Publisher="Altium Limited"
J5: "Header, 9-Pin, Dual row", LatestRevisionDate=17-Jul-2002, LatestRevisionNote="Re-released for DXP Platform.", Publisher="Altium Limited"
K1 K2 K3 K4 K5 K6: library part KEYB
L1: library part INDUCTOR
LED0 LED1 LED2 LED3 LED5 LED6: library part LED_Dup1
LED7 LED8: library part LED
LS1: library part SPEAKER
P1 P2 P4: library part "Header 2", "Header, 2-Pin", LatestRevisionDate=17-Jul-2002, LatestRevisionNote="Re-released for DXP Platform.", Publisher="Altium Limited"
P5: library part "Header 7X2", "Header, 7-Pin, Dual row", LatestRevisionDate=17-Jul-2002, LatestRevisionNote="Re-released for DXP Platform.", Publisher="Altium Limited"
Q1 Q2 Q3 Q4 Q5 Q6 Q7: library part PNP
R1 R8 R10 R12 R13 R14 R15 R28 R29 R30 R31 R41 R42 R43 R45 R47 R48 R49 R50 R51 R52: library part R
R2 R3 R75: library part RESISTOR
R4 R5 R6 R7 R11 R16 R32 R33 R34: library part R_Dup3
R9 R17 R20: library part R_Dup1
R18 R19 R21 R22 R35 R36 R37 R38 R39 R40 R44 R46: library part R_Dup2
R23 R24: library part R_Dup6
R25 R26 R27: library part R_Dup5
RN1 RN2 RN3 RN4 RN5 RN6 RN7 RN8 RN9 RN11 RN12 RN13 RN15 RN17 RN18 RN20 RN21 RN22 RN23 RN24 RN25 RN26 RN27 RN28 RN29 RN30 RN31 RN32 RN33: library part RN_Dup1
RN10 RN14 RN16 RN19 RN34: library part RN
SW1: library part "SW KEY-DPDT"
U2: library part SRV05-4
U4: library part CP2102_0
U5: library part 1117-3.3
U6: "Spartan-6 LX 1.2V FPGA, 186 User I/Os, 256-Ball Fine-Pitch Thin BGA (1.0mm Pitch), Speed Grade 2, Commercial Grade, Pb-Free", Code_JEDEC=MS-034-AAF-1*, ComponentLink1Description="Manufacturer URL", ComponentLink1URL=http://www.xilinx.com/, ComponentLink2Description="Spartan-6 Datasheet", ComponentLink2URL=http://www.xilinx.com/support/documentation/data_sheets/ds160.pdf, ComponentLink3Description="Spartan-6 Documents", ComponentLink3URL=http://www.xilinx.com/support/documentation/spartan-6.htm, DatasheetVersion="ver1.6, Nov-2010", PackageDescription="256-Ball Fine Pitch Thin Ball Grid Array 1.00 mm Pitch (FTG256) - Pb-Free", PackageReference=FTG256, PackageVersion="ver1.3, Oct-2007"
U8: "16 Mb (x1) Automotive Serial NOR Flash Memory, 75 MHz, 2.7 to 3.6 V, 8-pin SO8 Narrow (MN), Tube", Manufacturer=Micron, Package="SO8 Narrow爘ISHIDDEN=T", Voltage=2.7V-3.6V爘ISHIDDEN=T, Applications=Automotive爘ISHIDDEN=T, ComponentLink1Description="Manufacturer URL", ComponentLink1URL=http://www.micron.com/, ComponentLink2Description=Datasheet, ComponentLink2URL=http://www.micron.com/~/media/Documents/Products/Data%20Sheet/NOR%20Flash/Serial%20NOR/M25P/M25P16.pdf, ComponentLink3Description="Package Specification", ComponentLink3URL=http://www.micron.com/~/media/Documents/Products/Data%20Sheet/NOR%20Flash/Serial%20NOR/M25P/M25P05A.pdf, DatasheetVersion="Rev. Y", Density=16Mb爘ISHIDDEN=T, Mounting Technology="Surface Mount", PackageDescription="8-Pin SO Narrow, 3.9 X 4.9 mm, Pitch 1.27 mm", PackageReference=MICT-MN-8, PackageVersion="Rev 11", Part Family=M25P爘ISHIDDEN=T, Part Status=Production爘ISHIDDEN=T, PartNumber=M25P16-VMN3PB, RoHS=Yes爘ISHIDDEN=T, Speed="75 MHz爘ISHIDDEN=T", Type="Data Storage爘ISHIDDEN=T", Width=x1爘ISHIDDEN=T
U9: library part HY57651620/SO_0
U11: library part DS1302_8SO, ICA_MFR_NAME="MAXIM INTEGRATED PRODUCTS INC", ICA_PARTNUM=$$2098133$$DS1302S, Part Number=TMP-13
U12: library part 24LC04B_0
X1: library part OSC
Y1: library part ZTA

## Free pads (board coordinates)
  round 5 hole 3.2: 0(29.718,29.464) 0(29.718,122.936) 0(173.482,29.464) 0(173.482,122.936)

## Via types
v1: diameter 0.8, hole 0.4, Top Layer to Bottom Layer, 13 vias
v2: diameter 0.48, hole 0.25, Top Layer to Bottom Layer, 13 vias

## Nets (pads, with @x,y where several pads share a name; then routed paths per layer and width w, separated by ;. In a path a pad name is that pad's centre, name@x,y a point inside that pad or via, vN(x,y) a via of type N, cw(c..) or ccw(c..) an arc to the next point about the centre after c; other vN are vias at no path point)
_A4: J3.3 RN22.4
_A5: J3.5 RN22.2
_A6: J3.7 RN21.4
_A7: J3.8 RN21.3
_A8: J3.10 RN21.1
_A9: J3.12 RN20.3
_A10: J3.13 RN20.2
_A11: J3.15 RN18.4
_A12: J3.16 RN18.3
_A13: J3.18 RN18.1
_A14: J3.19 RN17.4
_B5: J3.4 RN22.3
_B6: J3.6 RN22.1
_B8: J3.9 RN21.2
_B10: J3.14 RN20.1
_B12: J3.17 RN18.2
_B14: J3.20 RN17.3
_B15: J3.21 RN17.2
_B16: J3.22 RN17.1
_C8: J3.11 RN20.4
_C9: J3.27 RN13.4
_C10: J3.29 RN13.2
_C15: J3.23 RN15.4
_C16: J3.24 RN15.3
_D11: J3.30 RN13.1
_D16: J3.25 RN15.2
_E11: J3.28 RN13.3
_E15: J3.26 RN15.1
_E16: J3.31 RN12.4
_F15: J3.32 RN12.3
_F16: J3.33 RN12.2
_G16: J3.34 RN12.1
_H15: J3.35 RN11.4
_H16: J3.36 RN11.3
_J16: J2.4 RN1.8
_K15: J2.6 RN1.6
_K16: J2.3 RN1.7
_L8: J2.21 RN5.5
_L16: J2.5 RN1.5
_M4: J2.32 RN8.8
_M5: J2.35 RN9.7
_M15: J2.7 RN2.7
_M16: J2.8 RN2.8
_N4: J2.36 RN9.8
_N6: J2.34 RN8.6
_N16: J2.10 RN2.6
_P2: J2.31 RN8.7
_P6: J2.33 RN8.5
_P15: J2.12 RN3.8
_P16: J2.9 RN2.5
_R1: J2.29 RN7.5
_R2: J2.30 RN7.6
_R5: J2.28 RN7.8
_R7: J2.23 RN6.7
_R9: J2.19 RN5.7
_R12: J2.17 RN4.5
_R14: J2.16 RN4.8
_R15: J2.14 RN3.6
_R16: J2.11 RN3.7
_T4: J2.27 RN7.7
_T5: J2.25 RN6.5
_T6: J2.26 RN6.6
_T7: J2.24 RN6.8
_T9: J2.22 RN5.6
_T12: J2.20 RN5.8
_T13: J2.18 RN4.6
_T14: J2.15 RN4.7
_T15: J2.13 RN3.5
A4: RN22.5 U6.A4
A5: RN22.7 U6.A5
A6: RN21.5 U6.A6
A7: RN21.6 U6.A7
A8: RN21.8 U6.A8
A9: RN20.6 U6.A9
A10: RN20.7 U6.A10
A11: RN18.5 U6.A11
A12: RN18.6 U6.A12
A13: RN18.8 U6.A13
A14: RN17.5 U6.A14
B5: RN22.6 U6.B5
B6: RN22.8 U6.B6
B8: RN21.7 U6.B8
B10: RN20.8 U6.B10
B12: RN18.7 U6.B12
B14: RN17.6 U6.B14
B15: RN17.7 U6.B15
B16: RN17.8 U6.B16
BLUE: C40.1 J4.3 RN31.2 RN31.3 RN31.4 RN32.4 RN32.8 RN33.8
BUZZER: CB1.1 U6.J11
C8: RN20.5 U6.C8
C9: RN13.5 U6.C9
C10: RN13.7 U6.C10
C15: RN15.5 U6.C15
C16: RN15.6 U6.C16
CLK: R3.1 U6.T8
D1V2: C5.1 C6.1 C7.1 C8.1 C9.1 C48.1 EC4.1 P4.2 U5.2 U5.4 U6.G7 U6.G9 U6.H8 U6.H10 U6.J7 U6.J9 U6.K8 U6.K10
D3V3: C4.2 C10.1 C11.1 C12.1 C13.1 C14.1 C15.1 C16.1 C17.1 C18.1 C19.1 C20.1 C21.1 C22.1 C23.1 C24.1 C25.1 C26.1 C27.1 C28.1 C35.1 C36.1 C37.1 C43.1 C44.1 C47.1 C49.1 EC5.1 EC6.1 J2.39 J2.40 J3.39 J3.40 J5.1 L1.1 LED7.1 LED8.1 P1.2 P5.2 Q1.2 Q2.2 Q3.2 Q4.2 Q5.2 Q6.2 Q7.2 R1.1 R9.2 R12.1 R13.2 R14.2 R15.2 R17.2 R18.1 R19.1 R23.1 R24.1 R25.1 R26.1 R27.1 R32.1 R35.1 R36.1 R37.1 R38.1 R41.1 R42.1 R43.1 R45.1 R47.1 R50.2 R52.1 U1.2 U1.4 U5.3 U6.B4 U6.B9 U6.B13 U6.D2 U6.D7 U6.D10 U6.D15 U6.E5 U6.F8 U6.F11 U6.G4 U6.G10 U6.G13 U6.H6 U6.J2 U6.J10 U6.J15 U6.K4 U6.K13 U6.L6 U6.L9 U6.N2 U6.N7 U6.N10 U6.N15 U6.R4 U6.R8 U6.R13 U8.8 U9.1 U9.3 U9.9 U9.14 U9.27 U9.43 U9.49 U11.8 U12.8 U14.4
D11: RN13.8 U6.D11
D16: RN15.7 U6.D16
DIG0: RN14.7 U6.C7
DIG1: RN10.5 U6.E6
DIG2: RN10.7 U6.C5
DIG3: RN14.6 U6.F7
DIG4: RN10.8 U6.D6
DIG5: RN14.8 U6.E7
DIG6: RN10.6 U6.D5
DIG7: RN14.5 U6.C6
E11: RN13.6 U6.E11
E12: J5.17 U6.E12
E15: RN15.8 U6.E15
E16: RN12.5 U6.E16
F12: J5.13 U6.F12
F13: J5.15 U6.F13
F14: J5.18 U6.F14
F15: RN12.6 U6.F15
F16: RN12.7 U6.F16
FPGA_DONE: LED5.1 R17.1 U6.P13
FPGA_INIT_B: R9.1 U6.R3
FPGA_PROG_B: R22.1 U6.T2
FPGA_TCK: R28.2 U6.C14
FPGA_TDI: R48.2 U6.C12
FPGA_TDO: R29.2 U6.E14
FPGA_TMS: R8.2 U6.A15
G11: J5.9 U6.G11
G12: J5.12 U6.G12
G14: J5.16 U6.G14
G16: RN12.8 U6.G16
GND: C1.2 C2.2 C3.2 C4.1 C5.2 C6.2 C7.2 C8.2 C9.2 C10.2 C11.2 C12.2 C13.2 C14.2 C15.2 C16.2 C17.2 C18.2 C19.2 C20.2 C21.2 C22.2 C23.2 C24.2 C25.2 C26.2 C27.2 C28.2 C35.2 C36.2 C37.2 C38.2 C39.2 C40.2 C41.2 C42.2 C43.2 C44.2 C45.2 C46.2 C47.2 C48.2 C49.2 D1.1 EC2.2 EC4.2 EC5.2 EC6.2 J1.5 J2.1 J2.37 J2.38 J3.1 J3.37 J3.38 J4.5 J4.6 J4.7 J4.8 J4.10 J5.2 K1.2 K2.2 K3.1 K4.2 K5.2 K6.1 LED0.2 LED1.2 LED2.2 LED3.2 LED6.2 LS1.2 P1.1 P2.1 P4.1 P5.1 P5.3 P5.5 P5.7 P5.9 P5.11 P5.13 R10.1 R20.1 R49.2 R51.2 U1.1 U2.2 U4.3 U5.1 U6.A1 U6.A16 U6.B7 U6.B11 U6.D4 U6.D13 U6.E9 U6.G2 U6.G8 U6.G15 U6.H7 U6.H9 U6.H12 U6.J5 U6.J8 U6.K7 U6.K9 U6.L2 U6.L15 U6.M8 U6.N13 U6.P3 U6.R6 U6.R10 U6.T1 U6.T16 U8.4 U9.6 U9.12 U9.28 U9.41 U9.46 U9.52 U9.54 U10.2 U11.4 U12.1 U12.2 U12.3 U12.4 U12.7 U14.6 U14.11 U14.12 U14.13 X1.2
GREEN: C39.1 J4.2 RN26.2 RN26.3 RN26.4 RN27.4 RN27.8 RN28.8 RN30.8
H11: J5.10 U6.H11
H13: J5.11 U6.H13
H14: J5.14 U6.H14
H15: RN11.5 U6.H15
H16: RN11.6 U6.H16
HSWAPEN: R49.1 U6.C4
J12: J5.7 U6.J12
J13: J5.5 U6.J13
J14: J5.8 U6.J14
J16: RN1.1 U6.J16
K12: J5.3 U6.K12
K14: J5.6 U6.K14
K15: RN1.3 U6.K15
K16: RN1.2 U6.K16
KEY1: R46.1 U6.C3
KEY2: R44.1 U6.D3
KEY3: R40.1 U6.E4
KEY4: R39.1 U6.E3
L8: RN5.4 U6.L8
L14: J5.4 U6.L14
L16: RN1.4 U6.L16
LED0: RN34.4 U6.P4
LED1: RN34.3 U6.N5
LED2: RN34.2 U6.P5
LED3: RN34.1 U6.M6
LED_A: RN14.2 U13.11
LED_B: RN10.4 U13.7
LED_C: RN10.2 U13.4
LED_D: RN14.3 U13.1
LED_E: RN10.1 U13.3
LED_F: RN14.1 U13.10
LED_G: RN10.3 U13.6
LED_H: RN14.4 U13.2
M0: R50.1 U6.T11
M1: R51.1 U6.N11
M4: RN8.1 U6.M4
M5: RN9.2 U6.M5
M15: RN2.2 U6.M15
M16: RN2.1 U6.M16
N4: RN9.1 U6.N4
N6: RN8.3 U6.N6
N16: RN2.3 U6.N16
NetC1_1: C1.1 C2.1 R2.2 U4.6
NetC3_1: C3.1 C46.1 L1.2 R75.2 X1.4
NetC41_1: C41.1 J4.13 R30.1
NetC42_1: C42.1 J4.14 R31.1
NetCB1_2: CB1.2 R33.1
NetD1_2: D1.2 LS1.1 R34.2
NetF1_2: F1.2 SW1.2 SW1.5 | length 7.2
  Top Layer w0.5: F1.2@47.32,113.69 47.32,115.214 51.156,119.05 SW1.2@51.156,119.253
NetK1_1: K1.1 R38.2 R46.2
NetK2_1: K2.1 R37.2 R44.2
NetK3_2: K3.2 R36.2 R40.2
NetK4_1: K4.1 R35.2 R39.2
NetK5_1: K5.1 R19.2 R21.2
NetK6_2: K6.2 R18.2 R22.2
NetLED0_1: LED0.1 RN34.5
NetLED1_1: LED1.1 RN34.6
NetLED2_1: LED2.1 RN34.7
NetLED3_1: LED3.1 RN34.8
NetLED5_2: LED5.2 R20.2
NetLED6_1: LED6.1 R1.2
NetLED7_2: LED7.2 R7.2
NetLED8_2: LED8.2 R4.2
NetQ7_1: Q7.1 R32.2 R33.2
NetQ7_3: Q7.3 R34.1
NetR2_1: R2.1 U4.9
NetR3_2: R3.2 X1.3
NetR5_1: R5.1 U6.R11
NetR6_1: R6.1 U6.T10
NetR10_2: R10.2 U6.P14
NetR11_1: R11.1 U6.T3
NetR12_2: R12.2 U6.L11
NetR13_1: R13.1 U8.7
NetR14_1: R14.1 U8.3
NetR16_2: R16.2 U8.2
NetR45_2: R45.2 U14.8
NetR47_2: R47.2 U14.1
NetR52_2: R52.2 U14.9
NetR75_1: R75.1 X1.1
NetRN24_1: RN24.1 RN24.2
NetRN25_1: RN25.1 RN25.2
NetRN25_3: RN25.3 RN25.4
NetRN25_6: RN25.6 RN25.7
NetRN27_1: RN27.1 RN27.2
NetRN28_1: RN28.1 RN28.2
NetRN28_3: RN28.3 RN28.4
NetRN28_6: RN28.6 RN28.7
NetRN29_1: RN29.1 RN29.2
NetRN29_3: RN29.3 RN29.4
NetRN29_6: RN29.6 RN29.7
NetRN29_8: RN29.8 RN30.5
NetRN30_1: RN30.1 RN30.2
NetRN30_3: RN30.3 RN30.4
NetRN30_6: RN30.6 RN30.7
NetRN32_1: RN32.1 RN32.2
NetRN33_1: RN33.1 RN33.2
NetRN33_3: RN33.3 RN33.4
NetRN33_6: RN33.6 RN33.7
NetU10_1: U10.1 U11.1
NetU11_2: U11.2 Y1.1
NetU11_3: U11.3 Y1.2
P2: RN8.2 U6.P2
P6: RN8.4 U6.P6
P15: RN3.1 U6.P15
P16: RN2.4 U6.P16
R1: RN7.4 U6.R1
R2: RN7.3 U6.R2
R5: RN7.1 U6.R5
R7: RN6.2 U6.R7
R9: RN5.2 U6.R9
R12: RN4.4 U6.R12
R14: RN4.1 U6.R14
R15: RN3.3 U6.R15
R16: RN3.2 U6.R16
RED: C38.1 J4.1 RN23.2 RN23.3 RN23.4 RN24.4 RN24.8 RN25.8
RESET: R21.1 U6.L3
RTC_DATA: R25.2 U6.D14 U11.6
RTC_nRST: R26.2 U6.C13 U11.5
RTC_SCLK: R27.2 U6.E13 U11.7
RXD: R7.1 U4.26 U6.C11
S_A0: U6.J3 U9.23 | length 37.5
  Top Layer w0.1: U6.J3@116.491,79.534 v2(116.983,79.042)
  Top Layer w0.15: U9.23@123.735,50.902 123.742,50.895 123.742,47.962 v1(123.749,47.955)
  Bottom Layer w0.15: v2(116.983,79.042) 116.983,77.251 118.825,75.409 123.749,70.485 v1(123.749,47.955)